# Altium PCB Main.PcbDoc
Units mm, origin at the board's own origin, x right, y up, seen from the top; angles counter-clockwise.
Board outline 50 x 50 mm, 4 copper layers (Top Layer, Ground Layer, Power Layer, Bottom Layer), stack 1.591 mm thick; 24 components, 12 nets, 62 pads, 25 vias.
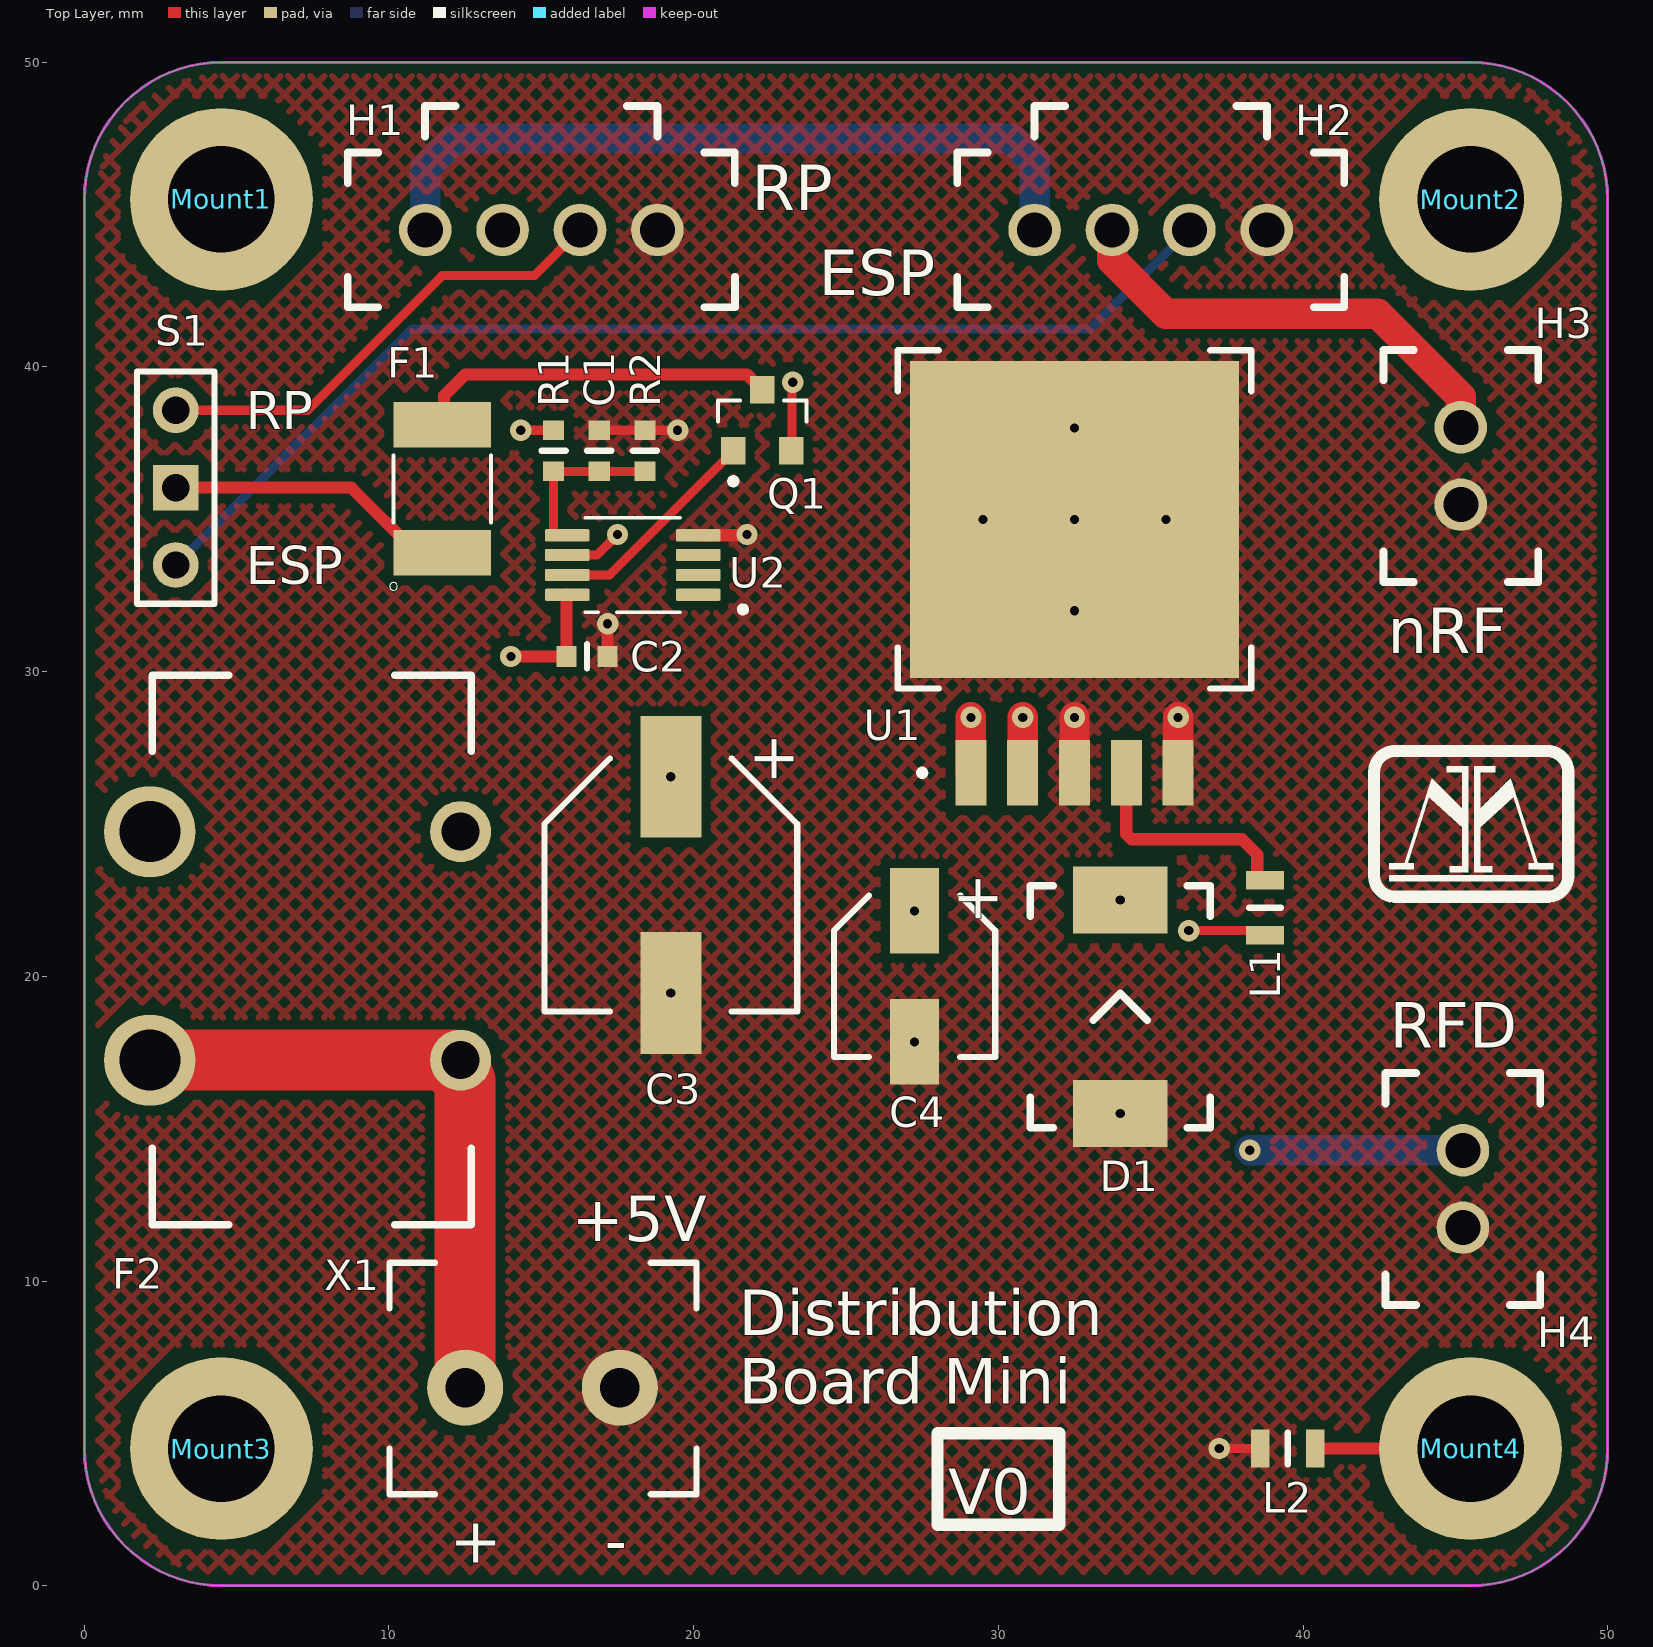
[diagram p0: Top Layer view]
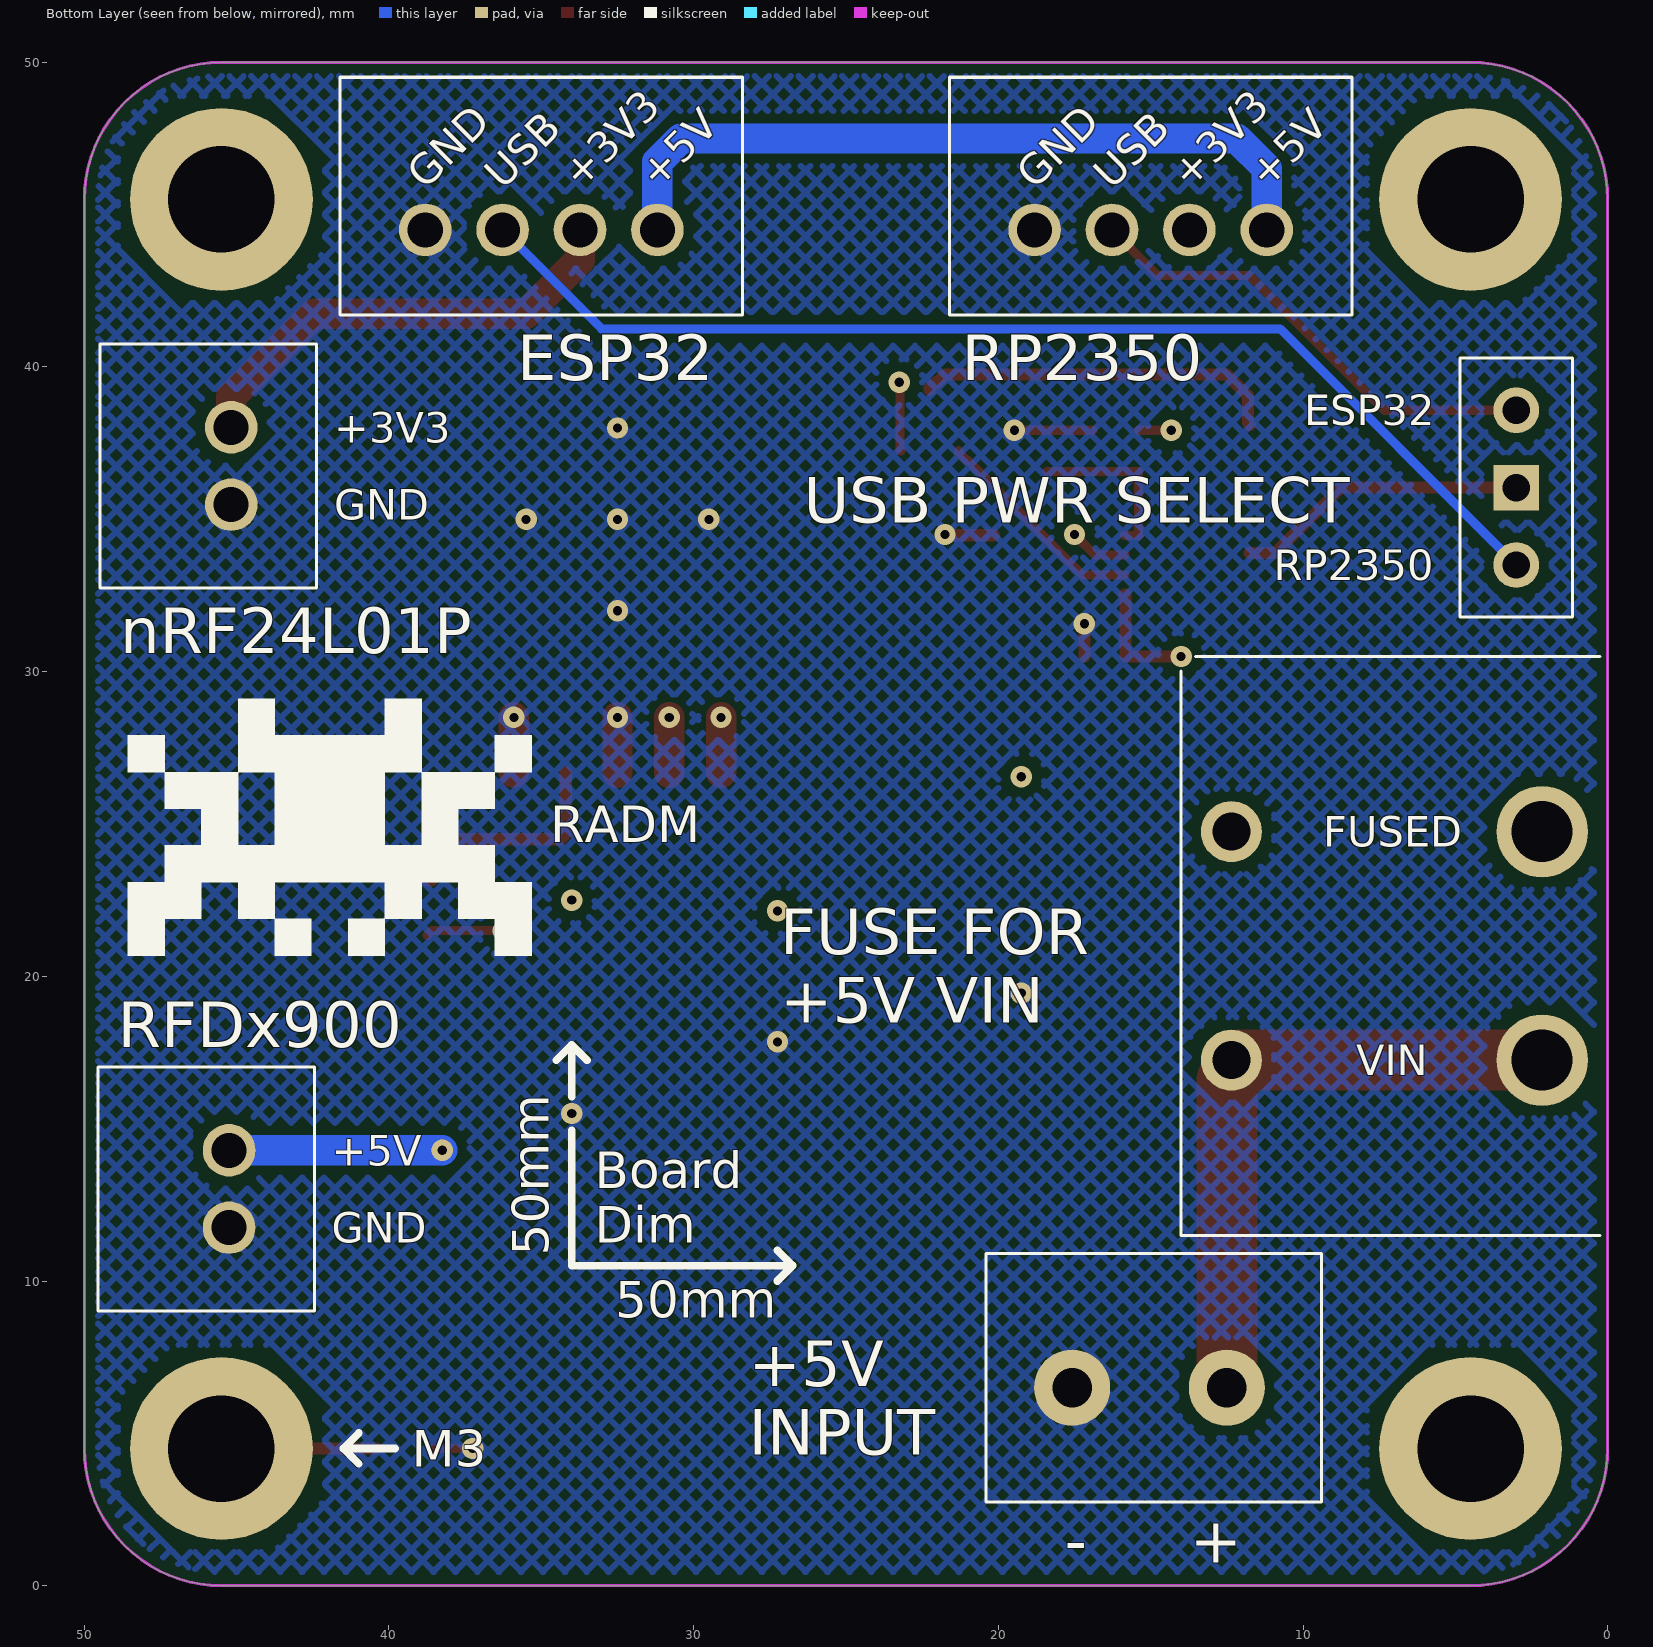
[diagram p1: Bottom Layer view, seen from below]
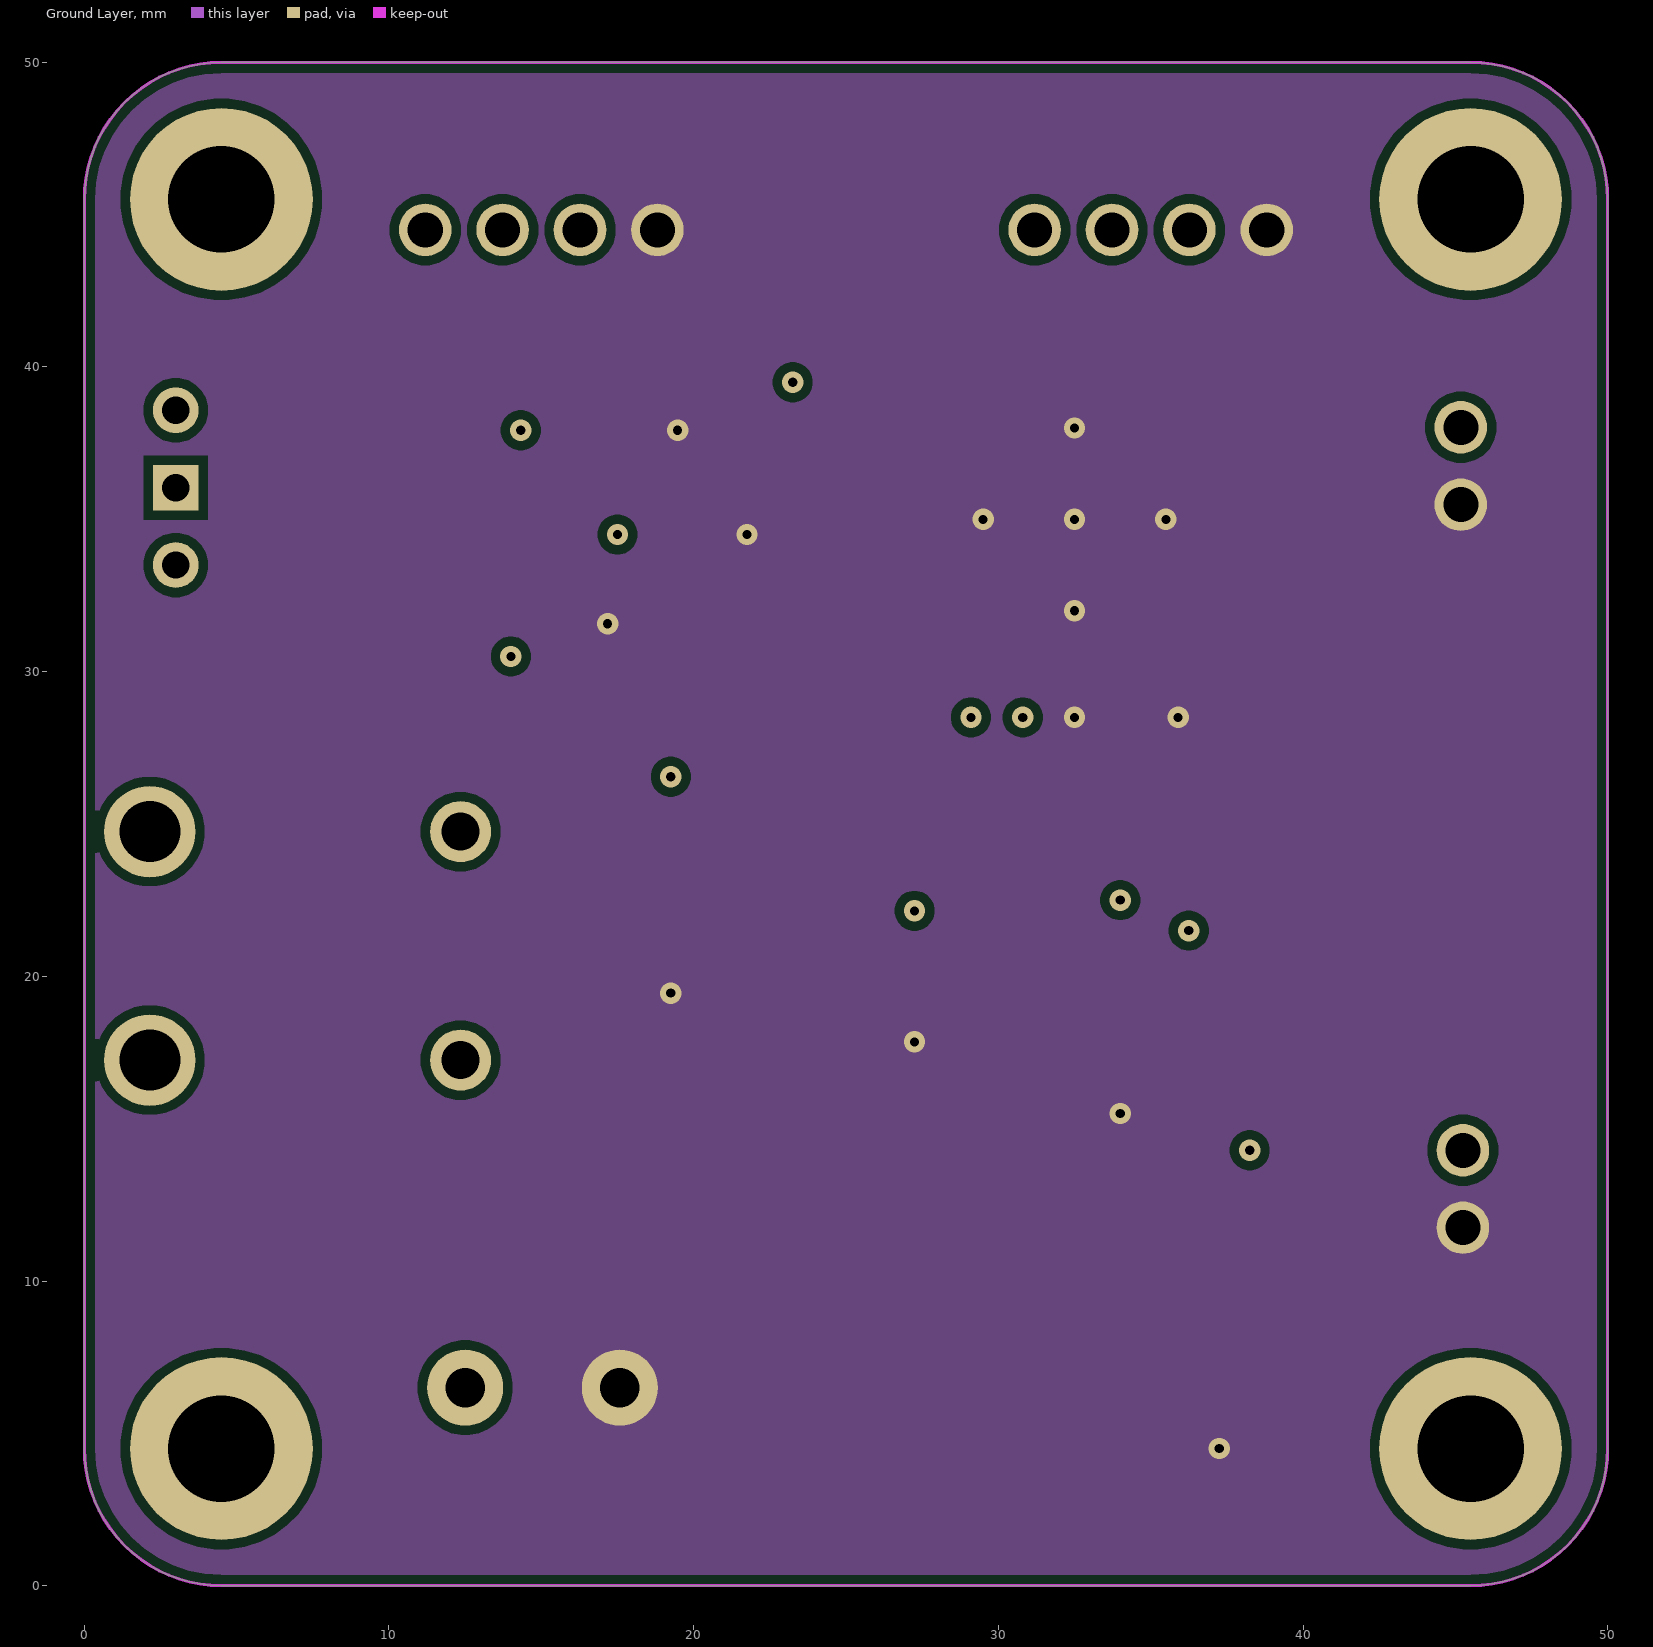
[diagram p2: Ground Layer]
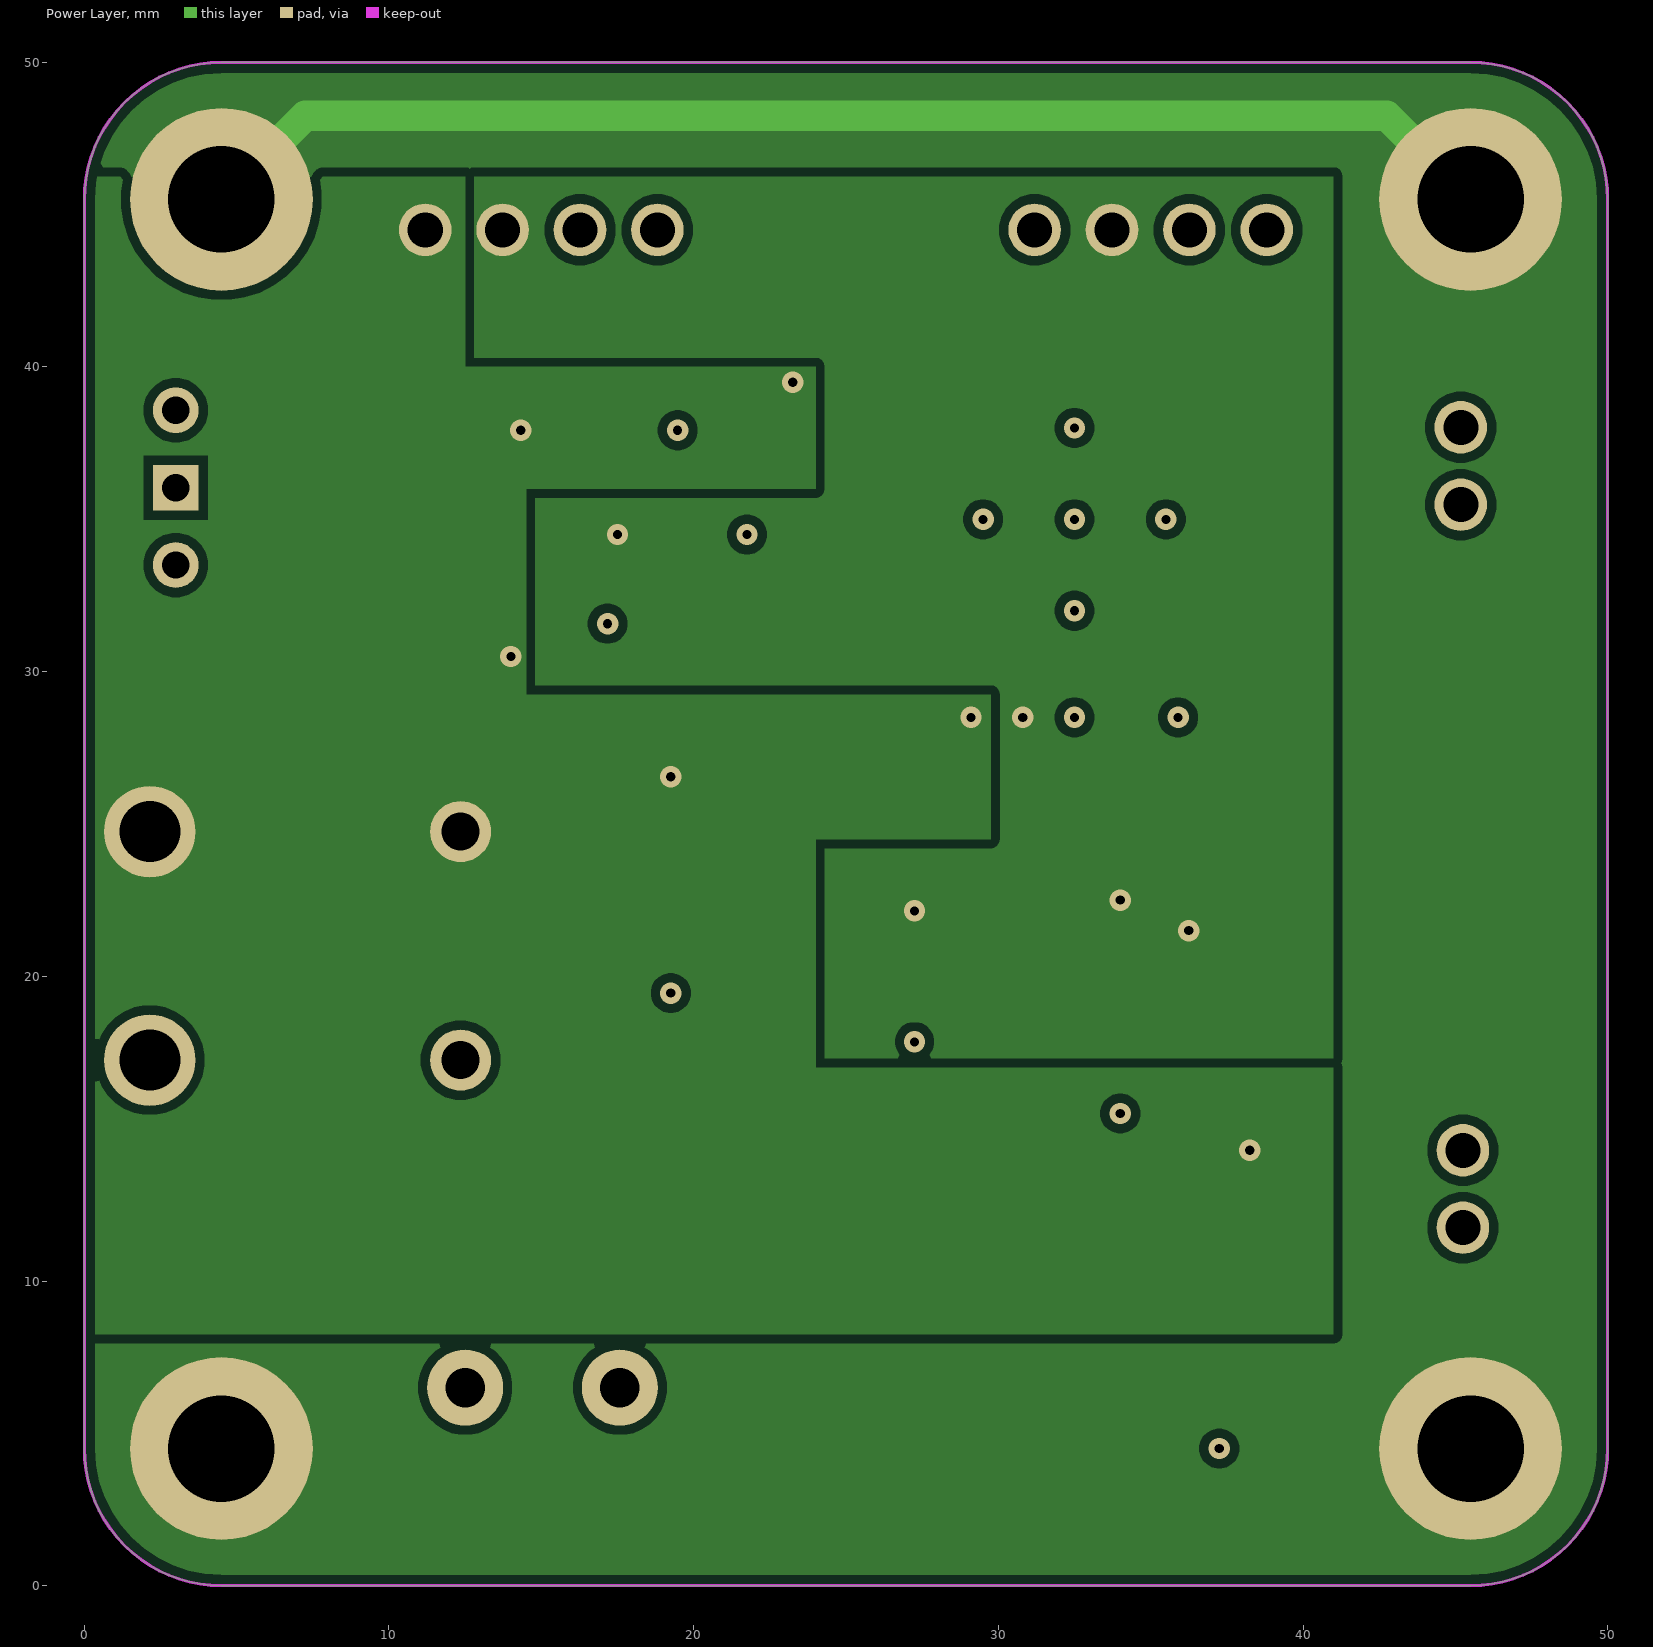
[diagram p3: Power Layer]
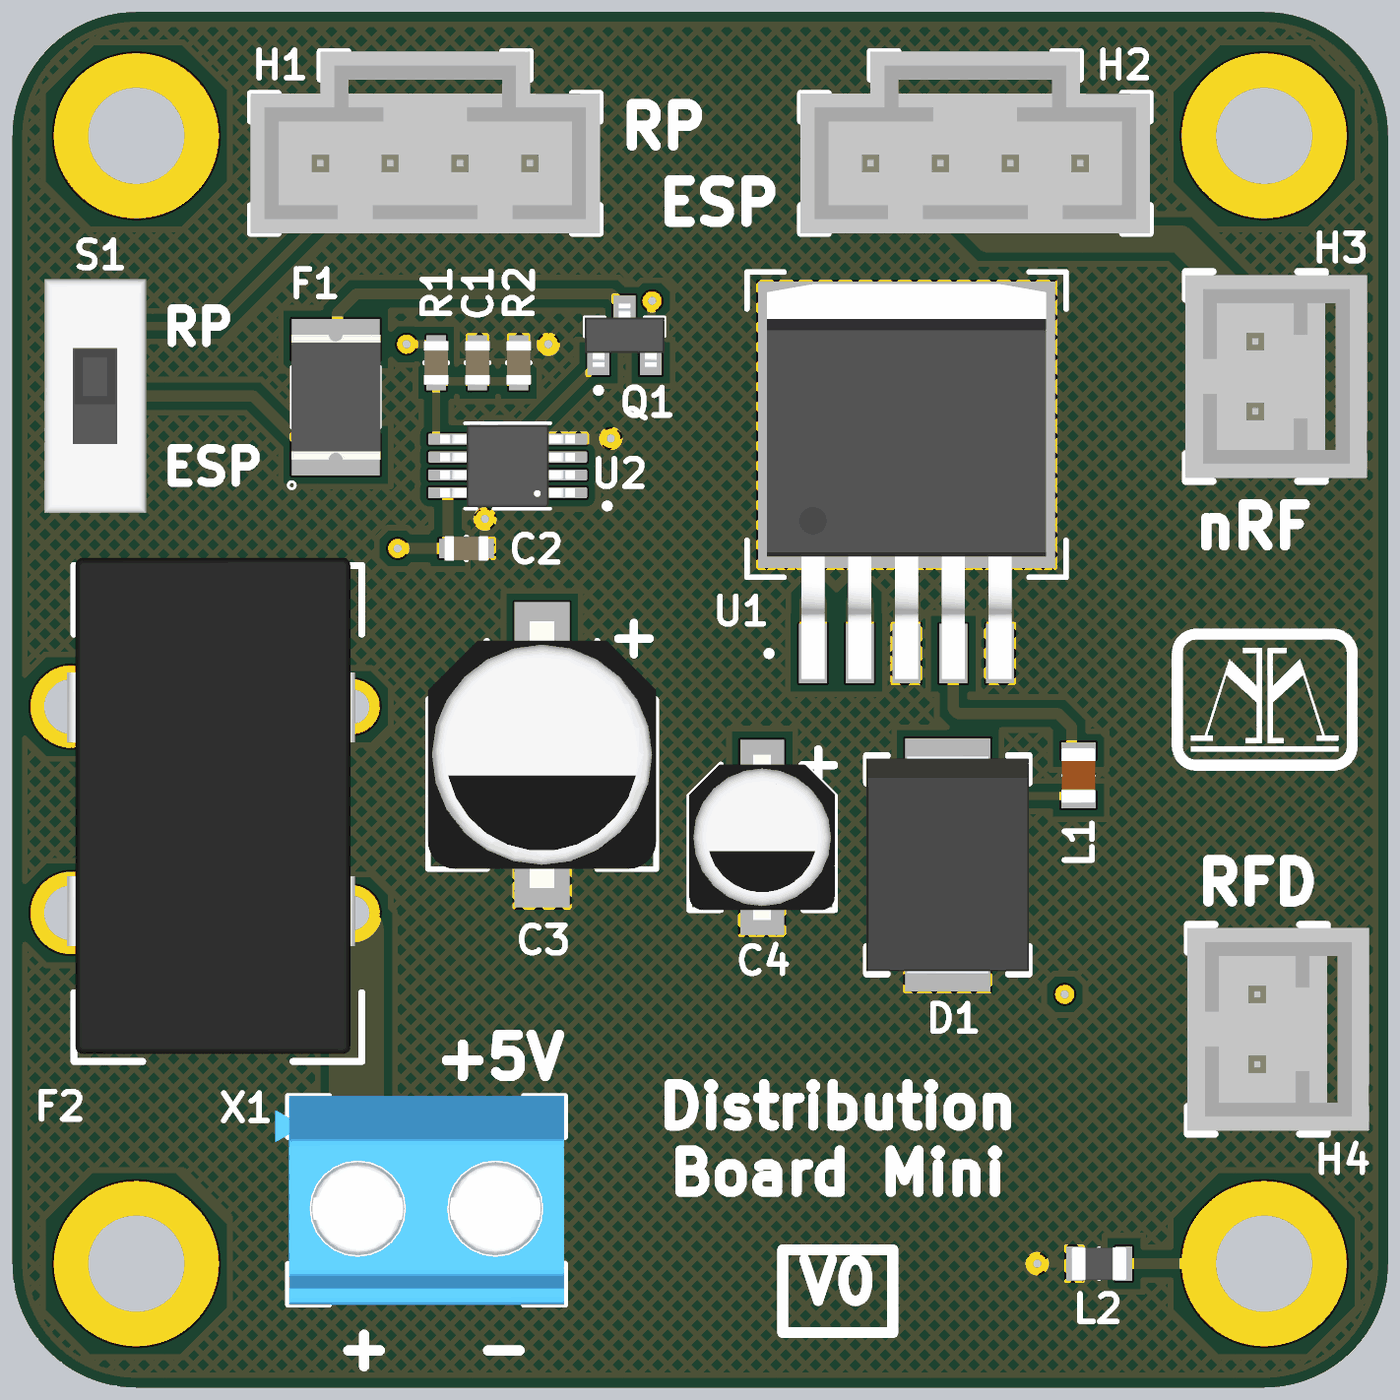
[diagram p4: 3D render of the assembled board from above, using the file's embedded part models]

## Layer stack, top to bottom
Top Solder: solder mask 0.0102, Solder Resist, Dk 3.8
Top Layer: signal copper 0.035
Dielectric 2: prepreg 0.2104, 7628*1, Dk 4.4
Ground Layer: signal copper 0.0175
Dielectric 1: dielectric 1.065, FR-4, Dk 4.8
Power Layer: signal copper 0.0175
Dielectric 3: prepreg 0.2104, 7628*1, Dk 4.4
Bottom Layer: signal copper 0.035
Bottom Solder: solder mask 0.0102, Solder Resist, Dk 3.8

## Board outline
4.5,0 cw(c4.5,4.5) 0,4.5 0,45.5 cw(c4.5,45.5) 4.5,50 45.5,50 cw(c45.5,45.5) 50,45.5 50,4.5 cw(c45.5,4.5) 45.5,0

## Design rules (kind name [scope] priority, off if disabled: settings)
BoardOutlineClearance [All] p1: gap=0.2 ignorepadtopadclearanceinfootprint=FALSE
Clearance "inPolygon Clearance" [InPolygon] p1: gap=0.3 ignorepadtopadclearanceinfootprint=TRUE // this rule ensures that every net within a polygon of a different net has a set clearance from the poly
Clearance "Different Diff Pair" [All] p2: gap=0.2 ignorepadtopadclearanceinfootprint=TRUE
Clearance "Same Diff Pair" [All] p3: gap=0.1 ignorepadtopadclearanceinfootprint=TRUE
Clearance "Different Nets" [not InAnyDifferentialPair] p4: gap=0.3 ignorepadtopadclearanceinfootprint=TRUE except(0.1: Arc-SMDPad Arc-THPad Arc-Via Arc-Text Track-SMDPad Track-THPad Track-Via Track-Text SMDPad-Text THPad-Text Via-Text Fill-Text Poly-Text Region-Text Text-Text; 0.12: Arc-Arc Arc-Track Track-Track; 0.15: SMDPad-SMDPad SMDPad-THPad SMDPad-Via THPad-THPad THPad-Via Via-Via; 0.2: Arc-Hole Track-Hole SMDPad-Hole THPad-Hole Via-Hole Fill-Hole Poly-Hole Region-Hole Text-Hole)
Clearance "Same Net" [not InAnyDifferentialPair] p5: gap=0 ignorepadtopadclearanceinfootprint=TRUE except(0.1: THPad-Via; 0.18: Arc-Arc Arc-Track Track-Track)
ComponentClearance [All] p1: gap=0.102 collisioncheckmode=3 verticalgap=0.102 showdistances=TRUE
DiffPairsRouting "Ethernet Routing" [InDifferentialPairClass('Ethernet_Pairs')] p1: maxlimit=0.25 minlimit=0.2 mostfreqgap=0.25 toplayer_maxgap=0.2 toplayer_prefgap=0.2 toplayer_minwidth=0.25 toplayer_maxwidth=0.25 toplayer_prefwidth=0.25 midlayer1_mingap=0.25 midlayer1_minwidth=0.19 midlayer1_maxwidth=0.19 midlayer1_prefwidth=0.19 midlayer2_mingap=0.25 midlayer2_minwidth=0.19 midlayer2_maxwidth=0.19 midlayer2_prefwidth=0.19 bottomlayer_maxgap=0.2 bottomlayer_prefgap=0.2 bottomlayer_minwidth=0.25 bottomlayer_maxwidth=0.25 bottomlayer_prefwidth=0.25 impedanceprofiledriven=TRUE maxuncoupledlength=12.7
DiffPairsRouting "USB Routing" [InDifferentialPairClass('USB_Pairs')] p2: maxlimit=0.291 minlimit=0.127 mostfreqgap=0.291 toplayer_maxgap=0.127 toplayer_prefgap=0.127 toplayer_minwidth=0.23 toplayer_maxwidth=0.23 toplayer_prefwidth=0.23 midlayer1_mingap=0.291 midlayer1_minwidth=0.25 midlayer1_maxwidth=0.25 midlayer1_prefwidth=0.25 midlayer2_mingap=0.291 midlayer2_minwidth=0.25 midlayer2_maxwidth=0.25 midlayer2_prefwidth=0.25 bottomlayer_maxgap=0.127 bottomlayer_prefgap=0.127 bottomlayer_minwidth=0.23 bottomlayer_maxwidth=0.23 bottomlayer_prefwidth=0.23 impedanceprofiledriven=TRUE maxuncoupledlength=12.7
DiffPairsRouting "CAN Routing" [InDifferentialPairClass('CAN_Pairs')] p3: maxlimit=0.907 minlimit=0.5 mostfreqgap=0.907 toplayer_maxgap=0.5 toplayer_prefgap=0.5 toplayer_minwidth=0.201 toplayer_maxwidth=0.201 toplayer_prefwidth=0.201 midlayer1_mingap=0.907 midlayer1_minwidth=0.155 midlayer1_maxwidth=0.155 midlayer1_prefwidth=0.155 midlayer2_mingap=0.907 midlayer2_minwidth=0.155 midlayer2_maxwidth=0.155 midlayer2_prefwidth=0.155 bottomlayer_maxgap=0.5 bottomlayer_prefgap=0.5 bottomlayer_minwidth=0.201 bottomlayer_maxwidth=0.201 bottomlayer_prefwidth=0.201 impedanceprofiledriven=TRUE maxuncoupledlength=12.7
Height [All] p1: minheight=0 maxheight=1816.048 prefheight=12.7
HoleSize [All] p1: absolutevalues=TRUE maxlimit=6.3 minlimit=0.3 maxpercent=80.000 minpercent=20.000
HoleToHoleClearance [All] p1: gap=0.25 allowstackedmicrovias=FALSE
Length [All] p1: maxlimit=43.432 minlimit=0 usedelayunits=TRUE mindelay=0.000000 maxdelay=10000.000000
MatchedLengths "Diff Pair Matched Delays" [InDifferentialPairClass('Ethernet_Pairs') or InDifferentialPairClass('USB_Pairs') or InDifferentialPairClass('CAN_Pairs')] p1: tolerance=5 checknetsindiffpair=TRUE checkdiffpairvsdiffpair=FALSE checkxsignals=FALSE checkothers=FALSE usedelayunits=TRUE delaytolerance=100.000000
MinimumAnnularRing [All] p1: minimumring=0.2
MinimumSolderMaskSliver [All] p1: minsoldermaskwidth=0
PlaneClearance "Supply Net Clearance" [InNetClass('Supply_Nets')] p1: clearance=0.5
PlaneClearance "All Nets" [All] p2: clearance=0.3
PolygonConnect "Supply Nets" [InNetClass('Supply_Nets')] p1: connectstyle=Direct reliefconductorwidth=0.3 reliefentries=4 polygonreliefangle="90 Angle" airgapwidth=0.254
PolygonConnect General [All] p2: connectstyle=Relief reliefconductorwidth=0.254 reliefentries=4 polygonreliefangle="90 Angle" airgapwidth=0.254
RoutingVias [All] p1: holewidth=0.2 width=0.35 viastyle="Through Hole" minholewidth=0.15 minwidth=0.3 maxholewidth=6.3 maxwidth=6.55
SilkToSilkClearance [All] p1: silktosilkclearance=0
SilkToSolderMaskClearance [All] p1: minsilkscreentomaskgap=0 clearancetoexposedcopper=TRUE
SolderMaskExpansion [All] p1: expansion=0.075 istentingtop=FALSE
SupplyNets "Schematic Supply Nets_2" [InNet('+5V')] p1: voltage=0.000
SupplyNets "Schematic Supply Nets_7" [InNet('+3V3')] p2: voltage=0.000
SupplyNets "Schematic Supply Nets_3" [InNet('GND')] p3: voltage=0.000
SupplyNets "Schematic Supply Nets_1" [InNet('Earth')] p4: voltage=0.000
UnRoutedNet [All] p1: checkbadconnections=TRUE
Width [All] p1: maxlimit=100 minlimit=0.1 preferedwidth=0.3
Width "nRF Width" [InNetClass('nRF Signal')] p2: maxlimit=0.379 minlimit=0.263 preferedwidth=0.379 toplayer_minwidth=0.379 midlayer1_maxwidth=0.263 midlayer1_prefwidth=0.263 midlayer2_maxwidth=0.263 midlayer2_prefwidth=0.263 bottomlayer_minwidth=0.379 impedanceprofiledriven=TRUE minimp=50.000000 maximp=50.000000 favimp=50.000000 checkconnectedcopper=TRUE
20 further rules are at their usual default settings.

## Classes and differential pairs
net class Supply_Nets: +3V3 +5V Earth GND
component class Main: C1 C2 C3 C4 D1 F1 F2 L1 L2 Mount1 Mount2 Mount3 Mount4 Q1 R1 R2 S1 U1 U2 X1
component class Connections: H1 H2 H3 H4

## Components (designator, comment, footprint, x,y, rotation, side; value= is the part's Value field where it differs from the comment)
C1 "[Cap] SMD Nonpolarized" "[Cap] SMD 0603" 16.9,37.25 r270 top
C2 "[Cap] SMD Nonpolarized" "[Cap] SMD 0603" 16.5,30.5 r180 top
C3 "SMD Polarized" "[Cap] SMD Polarized, 8mm" 19.25,23 r270 top
C4 "SMD Polarized" "[Cap] SMD Polarized, 5mm" 27.25,20 r270 top
D1 "Schottky" "[Diode] SMD DO-214AB" 34,19 r90 top
F1 "[PTC] 500mA Trip" "[PTC] 500mA Trip" 11.75,36 r90 top
F2 "Right-Angle" "[Fuse] Blade Right-Angle" 7.25,21 r270 top
H1 "1x4 Male" "[Header] Shrouded 1x4 Male" 15,44.5 r0 top
H2 "1x4 Male" "[Header] Shrouded 1x4 Male" 35,44.5 r0 top (schematic designator H3)
H3 "1x2 Male" "[Header] Shrouded 1x2 Male" 45.179,36.751 r270 top (schematic designator H2)
H4 "1x2 Male" "[Header] Shrouded 1x2 Male" 45.25,13.02 r270 top
L1 "SMD Inductor" "[Inductor] SMD 0805" 38.75,22.25 r270 top
L2 "652-MH2029-300Y" "[Ferrite] SMD Bead 0805 (1)" 39.5,4.5 r180 top
Mount1 "M3 Mount Hole" "[Mount] M3 Mount Hole" 4.5,45.5 r0 top
Mount2 "M3 Mount Hole" "[Mount] M3 Mount Hole" 45.5,45.5 r90 top
Mount3 "M3 Mount Hole" "[Mount] M3 Mount Hole" 4.5,4.5 r90 top
Mount4 "M3 Mount Hole" "[Mount] M3 Mount Hole" 45.5,4.5 r90 top
Q1 "PMV48XP" "[FET] P-Channel Mosfet" 22.25,38.25 r90 top
R1 "[Res] SMD Resistor" "[Res] SMD 0603" 15.4,37.25 r90 top
R2 "[Res] SMD Resistor" "[Res] SMD 0603" 18.4,37.25 r270 top
S1 "SPDT" "[Switch] SPDT" 3,38.58 r270 top
U1 "3.3V 3A" "[Reg] 3V3 Regulator (4)" 32.5,32.93 r270 top (schematic designator U2)
U2 "Comparator" "[IC] Dual Op-Ap" 18,33.5 r180 top (schematic designator U1)
X1 "2pin Screw Terminal" "[Screw Terminal] 2pin 5mm" 15,6.5 r0 top

## Footprints (in the part's own frame and the unit in brackets; to place one, negate y for a bottom-side part, rotate by r counter-clockwise, add the part's x,y. Pads: shape width x height; smd on the part's side, far side on the other; paste and mask are expansions set on the pad)
"[Cap] SMD 0603" [mm]
  rect 0.65x0.7 smd: 1(-0.675,0) 2(0.675,0)
  silkscreen extent 0,-0.4 0,0.4, body extent -0.8,-0.45 0.8,0.45, height 0.8
"[Cap] SMD Polarized, 5mm" [mm]
  rect 2.8x1.6 smd: 1(-2.15,0) 2(2.15,0)
  silkscreen extent -2.65,-2.65 2.65,2.65, body extent -3,-2.65 3,2.65, height 5.8
"[Cap] SMD Polarized, 8mm" [mm]
  rect 4x2 smd: 1(-3.55,0) 2(3.55,0)
  silkscreen extent -4.15,-4.15 4.15,4.15, body extent -4.85,-4.15 4.85,4.15, height 10.2
"[Diode] SMD DO-214AB" [mm]
  rect 2.2x3.1 smd: 1(3.5,0) 2(-3.5,0)
  silkscreen extent -3.97,-2.95 3.97,2.95, body extent -3.97,-2.95 3.97,2.95, height 2.5
"[Ferrite] SMD Bead 0805 (1)" [mm]
  rect 0.6x1.25 smd: 1(-0.9,0) 2(0.9,0)
  silkscreen extent 0,-0.53 0,0.53, body extent -1,-0.6 1,0.6, height 1.1
"[FET] P-Channel Mosfet" [mm] "PMV48XP"
  rect 0.9x0.8 smd: 1(-1,0.95) 2(-1,-0.95) 3(1,0)
  silkscreen extent -2.1,-1.45 0.65,1.45, body extent -1.15,-1.45 1.15,1.45, height 1.1
"[Fuse] Blade Right-Angle" [mm]
  round 2 hole 1.25: 1(-3.75,5.1) 2(3.75,5.1)
  round 3 hole 2: 1(-3.75,-5.1) 2(3.75,-5.1)
  silkscreen extent -8.88,-5.02 9.15,5.45, body extent -9.16,-5.27 8.87,5.2, height 6.04
"[Header] Shrouded 1x2 Male" [mm]
  round 1.725 hole 1.15: 1(-1.27,0) 2(1.27,0)
  silkscreen extent -3.81,-2.54 3.81,2.54, body extent -3.68,-2.54 3.68,4.06, height 11.71
"[Header] Shrouded 1x4 Male" [mm] "70543-0003 / Mates with 0050579404"
  round 1.725 hole 1.15: 1(-3.81,0) 2(-1.27,0) 3(1.27,0) 4(3.81,0)
  silkscreen extent -6.35,-2.54 6.36,4.06, body extent -6.35,-2.54 6.35,4.06, height 11.64
"[IC] Dual Op-Ap" [mm] "LMV358IDGKR"
  rrect25% 1.47x0.4 smd: 1(-2.15,0.975) 2(-2.15,0.325) 3(-2.15,-0.325) 4(-2.15,-0.975) 5(2.15,-0.975) 6(2.15,-0.325) 7(2.15,0.325) 8(2.15,0.975)
  silkscreen extent -3.72,-1.55 1.55,1.55, body extent -2.45,-1.5 2.45,1.5, height 1.1
"[Inductor] SMD 0805" [mm]
  rect 0.6x1.25 smd: 1(-0.9,0) 2(0.9,0)
  silkscreen extent 0,-0.53 0,0.53, body extent -1,-0.63 1,0.63, height 1
"[Mount] M3 Mount Hole" [mm] "Place at least 4.5mm from board edge. Plated."
  round 6 hole 3.5: 1(0,0)
"[PTC] 500mA Trip" [mm] "Part #: MF-MSMF050-2"
  rect 1.5x3.2 smd: 1(-2.1,0) 2(2.1,0)
  silkscreen extent -3.33,-1.6 1.1,1.73, body extent -2.27,-1.62 2.27,1.62, height 1.1
"[Reg] 3V3 Regulator (4)" [mm] "3A"
  rect 2.16x1.02 smd: 1(6.25,-3.4) 2(6.25,-1.7) 3(6.25,0) 4(6.25,1.7) 5(6.25,3.4)
  rect 10.41x10.8 smd: 3(-2.07,0)
  silkscreen extent -7.62,-5.8 6.35,5.8, body extent -7.17,-5.08 7.17,5.08, height 4.72
"[Res] SMD 0603" [mm]
  rect 0.65x0.7 smd: 1(-0.675,0) 2(0.675,0)
  silkscreen extent 0,-0.4 0,0.4, body extent -0.8,-0.45 0.8,0.45, height 0.8
"[Screw Terminal] 2pin 5mm" [mm]
  round 2.5 hole 1.3: 1(-2.5,0) 2(2.58,0)
  silkscreen extent -4.99,-3.5 5.09,4.1, body extent -5.45,-3.5 5.05,4.1, height 9.99
"[Switch] SPDT" [mm]
  round 1.5 hole 0.9: 1(0,0) 3(5.08,0)
  rect 1.5x1.5 hole 0.9: 2(2.54,0)
  silkscreen extent -1.27,-1.27 6.35,1.27, body extent -1.71,-1.85 6.79,1.85, height 7.15

## Part data
C1 C2: Capacitance=100nF, Size Package=0603, Supplier Part Number 1=311-1088-6-ND, Tolerance=5%, Voltage=6.3V, Supplier 1=DigiKey
C3: library part "[Cap] SMD Polarized", Capacitance=680uF, Max Voltage=6.3V, Supplier Part Number 1=PCE3781CT-ND, Tolerance=20%, Diameter=8mm, Supplier 1=DigiKey
C4: library part "[Cap] SMD Polarized", Capacitance=220uF, Max Voltage=6.3V, Supplier Part Number 1=493-17593-1-ND, Tolerance=20%, Diameter=5mm, Supplier 1=DigiKey
D1: library part "[Diode] SMD Schottky", "Generic", Size Package=DO-214AB, Supplier Part Number 1=B530C-FDICT-ND, Supplier 1=DigiKey
F1: "MF-MSMF050-2", Size Package=1812, Supplier Part Number 1=MF-MSMF050-2DKR-ND, Trip Current=500mA, Supplier 1=DigiKey
F2: library part "[Fuse] Blade Right-Angle", Supplier Part Number 1=36-3549-2-ND, Amperage=10A, Supplier 1=DigiKey
H1 H2: library part "[Header] Shrouded 1x4 Male", "70543-0003 / Mates with 005057-9404", Supplier Part Number 1=0705430003, Supplier 1=Avnet
H3 H4: library part "[Header] Shrouded 1x2 Male", "0705430036 / Mates with 0050579402", Supplier Part Number 1=WM4824-ND, Supplier 1=DigiKey, Supplier 2=DigiKey, Supplier Part Number 2=WM2900-ND
L1: library part "[Inductor] SMD Inductor", Inductance=33uH, Size Package=0805, Supplier Part Number 1=445-6399-1-ND, Supplier 1=DigiKey
L2: library part "[Ferrite] SMD Ferrite Bead (1)", Res @ Freq="30 @ 100MHz", Size Package=0805
Mount1 Mount2 Mount3 Mount4: library part "[Mount] M3 Mount Hole", "Place at least 4.5mm from board edge. Plated."
Q1: library part "[FET] P-Channel MOSFET", Size Package=TO236AB, Supplier Part Number 1=1727-PMV48XPA2RCT-ND, Supplier 1=DigiKey
R1 R2: "Generic", Resistance=10k, Size Package=0603, Supplier Part Number 1=311-10.0KHRDKR-ND, Tolerance=5%, Supplier 1=DigiKey
S1: library part "[Switch] SPDT Switch", Supplier Part Number 1=1948-1087-ND, Supplier 1=DigiKey
U1: library part "[Reg] 3V3 Regulator (4)", "3A", Supplier Part Number 1=LM2596SX-3.3/NOPBCT-ND, Supplier 1=DigiKey
U2: library part "[IC] Dual Op-Amp", "LMV358IDGKR", Supplier Part Number 1=296-13455-1-ND, Supplier 1=DigiKey
X1: library part "[Screw Terminal] 2pin", Supplier Part Number 1=102-6145-ND, Supplier 1=DigiKey

## Via types
v1: diameter 0.7, hole 0.3, Top Layer to Bottom Layer, 25 vias

## Nets (pads, with @x,y where several pads share a name; then routed paths per layer and width w, separated by ;. In a path a pad name is that pad's centre, name@x,y a point inside that pad or via, vN(x,y) a via of type N, cw(c..) or ccw(c..) an arc to the next point about the centre after c; other vN are vias at no path point)
+3V3: C4.1 D1.1 H1.2 H2.2 H3.1 L1.2 U1.2 U2.6 | length 21.6
  Top Layer w0.3: U2.6 16.825,33.825 v1(17.5,34.5) ; v1(36.25,21.5) 38.6,21.5 L1.2
  Top Layer w1: U1.2 v1(30.8,28.5) ; H2.2 33.741,44.489 33.741,43.509 35.5,41.75 42.45,41.75 45.178,39.022 H3.1
  other v1: 27.25,22.15 34,22.5
+5V: C2.2 C3.1 F2.1 H1.1 H2.1 H4.1 Q1.2 R1.2 U1.1 U2.8 | length 41
  Top Layer w0.3: v1(14.325,37.925) R1.2 ; Q1.2 23.225,37.275 23.225,39.475 v1(23.25,39.5)
  Top Layer w0.4: v1(14,30.5) C2.2 15.825,32.525 U2.8
  Top Layer w1: U1.1 v1(29.1,28.5)
  Bottom Layer w1: H1.1 11.19,46.52 12.17,47.5 30.42,47.5 31.19,46.73 H2.1 ; v1(38.25,14.29) H4.1
  other v1: 19.25,26.55
Earth: L2.1 Mount1.1 Mount2.1 Mount3.1 Mount4.1 | length 48.6
  Top Layer w0.4: L2.1 Mount4.1
  Power Layer w1: Mount3.1@4.5,4.25 Mount3.1 ; Mount1.1 7.25,48.25 42.75,48.25 Mount2.1
ESP32-USB-5V-VIN: H2.3 S1.3 | length 37.8
  Bottom Layer w0.3: S1.3 10.75,41.25 33.02,41.25 H2.3
GND: C1.1 C2.1 C3.2 C4.2 D1.2 H1.4 H2.4 H3.2 H4.2 L2.2 R2.1 U1.3 U1.5 U2.4 X1.2 | length 10.3
  Top Layer w0.3: C1.1 R2.1 v1(19.475,37.925) ; v1(37.25,4.5) L2.2
  Top Layer w0.4: C2.1 v1(17.175,31.575) ; U2.4 21.725,34.475 v1(21.75,34.5)
  Top Layer w1: U1.3@32.5,26.68 v1(32.5,28.5) ; U1.5 v1(35.9,28.5)
  other v1: 34,15.5 27.25,17.85 19.25,19.45 32.5,32 29.5,35 32.5,35 35.5,35 32.5,38
NetF1_1: F1.1 S1.2 | length 9.6
  Top Layer w0.4: S1.2 8.76,36.04 10.9,33.9 F1.1
NetF2_2: F2.2 X1.1 | length 21.1
  Top Layer w2: F2.2@1.9,17.25 12.1,17.25 12.1,16.979 12.5,16.579 X1.1
NetL1_1: L1.1 U1.4 | length 7.6
  Top Layer w0.4: U1.4 34.2,24.67 34.37,24.5 38,24.5 38.5,24 38.5,23.25 38.6,23.15 L1.1
"Op B (+) Input": C1.2 R1.1 R2.2 U2.5 | length 5.6
  Top Layer w0.3: U2.5 15.4,34.475 R1.1 C1.2 R2.2
"Op B Output": Q1.1 U2.7 | length 7.2
  Top Layer w0.3: U2.7 17.243,33.175 21.018,36.95 21.05,36.95 21.3,37.2 Q1.1
RP2350-USB-5V-VIN: H1.3 S1.1 | length 15.7
  Top Layer w0.3: S1.1 7.33,38.58 11.75,43 14.77,43 H1.3
USB-VIN: F1.2 Q1.3 | length 11.9
  Top Layer w0.4: F1.2 11.81,38.16 11.81,39.06 12.5,39.75 21.75,39.75 22,39.5 22.05,39.5 22.25,39.3 Q1.3
pads on no net: U2.1 U2.2 U2.3

## Polygon pours and split planes (outlines as drawn)
Earth on Power Layer "Earth Poly" (solid, remove dead copper, pour order 2): 41,46.25 0,46.25 0,50 50,50 50,0 0,0 0,8.25 41,8.25
+3V3 on Power Layer "+3V3 Power Poly" (solid, remove dead copper, pour order 1): 12.5,46.25 41,46.25 41,17 24,17 24,24.5 29.75,24.5 29.75,29.25 14.5,29.25 14.5,36 24,36 24,40 12.5,40
+5V on Power Layer "+5V Power Poly" (solid, remove dead copper, pour order 0): 41,8.25 41,17 24,17 24,24.5 29.75,24.5 29.75,29.25 14.5,29.25 14.5,36 24,36 24,40 12.5,40 12.5,46.25 0,46.25 0,8.25
GND on Ground Layer "GND Poly" (solid, remove dead copper, pour order 3): 0,50 50,50 50,0 0,0
GND on Top Layer "Top GND Poly" (hatched 45Degree grid 0.508 track 0.203, remove dead copper, pour order 4): 0,50 50,50 50,0 0,0
GND on Bottom Layer "Bottom GND Poly" (hatched 45Degree grid 0.508 track 0.203, remove dead copper, pour order 5): 0,50 50,50 50,0 0,0

## Keep-outs
Keep-Out Layer:
  the board outline again, w0.1

## Silkscreen, mask and mechanical layers (free items; w line width, h text height)
Top Overlay:
  drawing of 8 lines, arcs and shapes, not listed
  text "RP" at 21.9,45.14 h1.5
  text "ESP" at 24.101,42.36 h1.5
  text "RP" at 5.3,37.955 h1.25
  text "ESP" at 5.3,32.875 h1.25
  text "nRF" at 42.779,30.6 h1.5
  text "RFD" at 42.85,17.65 h1.5
  text "+5V" at 16.001,11.3 h1.5
  text "Distribution / Board Mini" at 21.478,5.971 h1.5
  text "V0" at 28.35,2.35 h1.5
  text "+" at 12,0.75 h1.5
  text "-" at 17.08,0.75 h1.5
Bottom Overlay:
  region: 40.587,20.682 40.136,20.682 40.136,21.886 41.339,21.886 41.339,21.885 41.341,21.885 41.341,20.682 40.588,20.682
  region: 35.318,27.571 35.318,27.909 36.521,27.909 36.521,27.908 36.523,27.908 36.523,26.705 35.318,26.705 35.318,27.57
  region: 47.364,27.076 47.364,27.908 47.365,27.908 47.365,27.909 48.568,27.909 48.568,26.705 47.364,26.705 47.364,27.074
  region: 43.75,21.791 43.75,20.682 42.545,20.682 42.545,21.885 42.547,21.885 42.547,21.886 43.75,21.886 43.75,21.792
  region: 38.953,29.114 40.136,29.114 40.136,27.909 43.75,27.909 43.75,29.114 44.955,29.114 44.955,26.705 43.75,26.705 43.75,24.295 44.955,24.295 44.955,26.705 47.364,26.705 47.364,25.502 47.362,25.502 47.362,25.5 46.159,25.5 46.159,24.295 47.362,24.295 47.362,24.294 47.364,24.294 47.364,23.091 48.568,23.091 48.568,20.682 47.364,20.682 47.364,21.886 46.161,21.886 46.161,21.888 46.159,21.888 46.159,23.091 44.955,23.091 44.955,21.888 44.953,21.888 44.953,21.886 43.75,21.886 43.75,23.091 40.136,23.091 40.136,21.886 38.933,21.886 38.933,21.888 38.932,21.888 38.932,23.091 37.727,23.091 37.727,21.888 37.726,21.888 37.726,21.886 36.523,21.886 36.523,20.682 35.318,20.682 35.318,23.091 36.523,23.091 36.523,24.294 36.524,24.294 36.524,24.295 37.727,24.295 37.727,25.5 36.524,25.5 36.524,25.502 36.523,25.502 36.523,26.705 38.932,26.705 38.932,24.295 40.136,24.295 40.136,26.705 38.932,26.705 38.932,29.114 38.952,29.114
  lines w0.1: 0.25,11.5 14,11.5 14,30.025 ; 0.25,30.5 13.525,30.5 ; 1.15,31.79 4.85,31.79 4.85,40.29 1.15,40.29 1.15,31.79 ; 8.395,41.71 21.605,41.71 21.605,49.51 8.395,49.51 8.395,41.71 ; 9.4,2.75 9.4,10.9 20.4,10.9 20.4,2.75 9.4,2.75 ; 28.395,41.71 41.605,41.71 41.605,49.51 28.395,49.51 28.395,41.71 ; 42.379,32.751 49.479,32.751 49.479,40.751 42.379,40.751 42.379,32.751 ; 42.45,9.02 42.45,17.02 49.55,17.02 49.55,9.02 42.45,9.02
  lines w0.254: 26.75,10.508 27.258,10 ; 27.258,11.008 26.75,10.5 34,10.5 34,14.948 ; 33.5,17.242 34.008,17.75 ; 34,16.052 34,17.75 34.508,17.242 ; 39.8,4.5 41.5,4.5 40.992,5.008 ; 40.992,4 41.5,4.508
  text "+5V" at 11.19,45.783 h1 r315
  text "+3V3" at 13.73,45.783 h1 r315
  text "USB" at 16.27,45.783 h1 r315
  text "GND" at 18.81,45.783 h1 r315
  text "+5V" at 31.19,45.783 h1 r315
  text "+3V3" at 33.73,45.783 h1 r315
  text "USB" at 36.27,45.783 h1 r315
  text "GND" at 38.81,45.783 h1 r315
  text "RP2350" at 21.205,39.56 h1.5
  text "ESP32" at 35.793,39.56 h1.5
  text "ESP32" at 9.965,38.08 h1
  text "+3V3" at 41.8,37.521 h1
  text "GND" at 41.8,34.981 h1
  text "USB PWR SELECT" at 26.393,34.89 h1.5
  text "RP2350" at 10.965,33 h1
  text "nRF24L01P" at 48.829,30.601 h1.5
  text "RADM" at 34.699,24.4 h1.2
  text "FUSED" at 9.333,24.25 h1
  text "FUSE FOR / +5V VIN" at 27.15,18.471 h1.5
  text "RFDx900" at 48.9,17.67 h1.5
  text "VIN" at 8.25,16.75 h1
  text "+5V" at 41.871,13.79 h1
  text "Board" at 33.25,13.05 h1.2
  text "Dim" at 33.25,11.25 h1.2
  text "GND" at 41.871,11.25 h1
  text "50mm" at 34.75,10.826 h1.2 r270
  text "50mm" at 32.574,8.8 h1.2
  text "+5V / INPUT" at 28.198,4.296 h1.5
  text "M3" at 39.25,3.9 h1.2
  text "+" at 12,0.75 h1.5
  text "-" at 17.08,0.75 h1.5

## Text inside footprints (layer, text, board x,y; h text height)
C3: Top Overlay "+" at 22,28 h1.5 r270
C4: Top Overlay "+" at 28.7,23.4 h1.5 r270